# Altium PCB PCB6.pcbdoc
Units mil, origin at the board's own origin, x right, y up, seen from the top; angles counter-clockwise.
Board outline 972.44 x 1667.32 mil, 2 copper layers (Top Layer, Bottom Layer); 10 components, 7 nets, 74 pads, 24 vias.
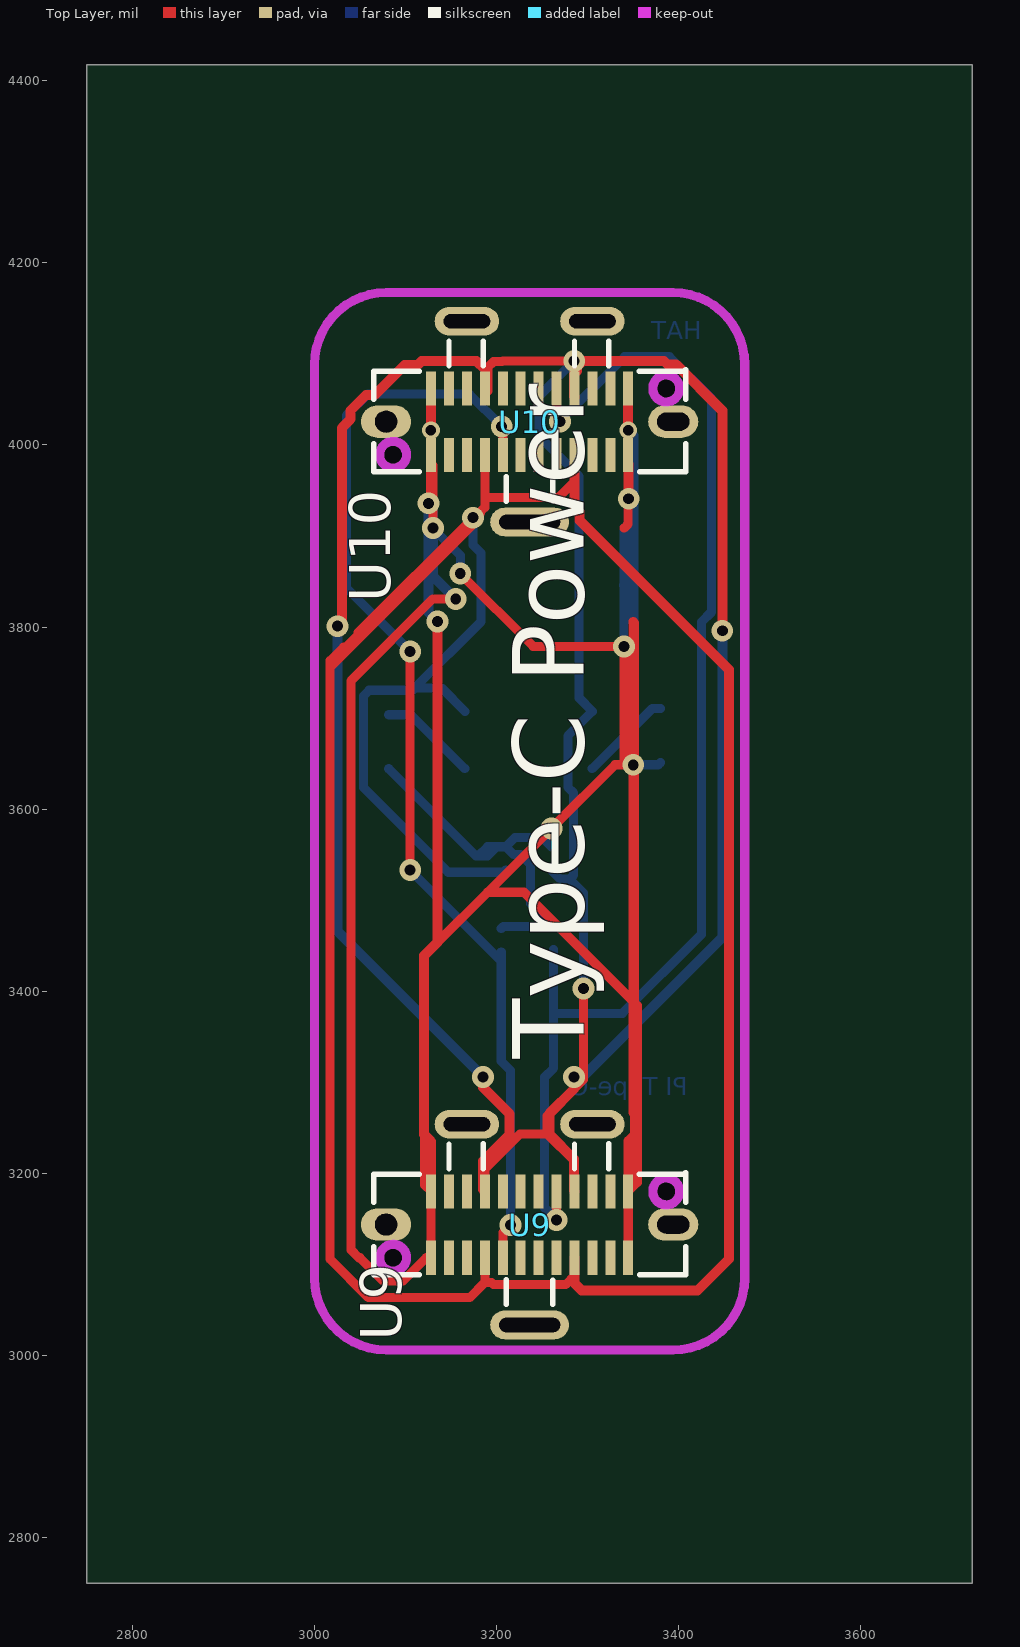
[diagram p0: Top Layer view]
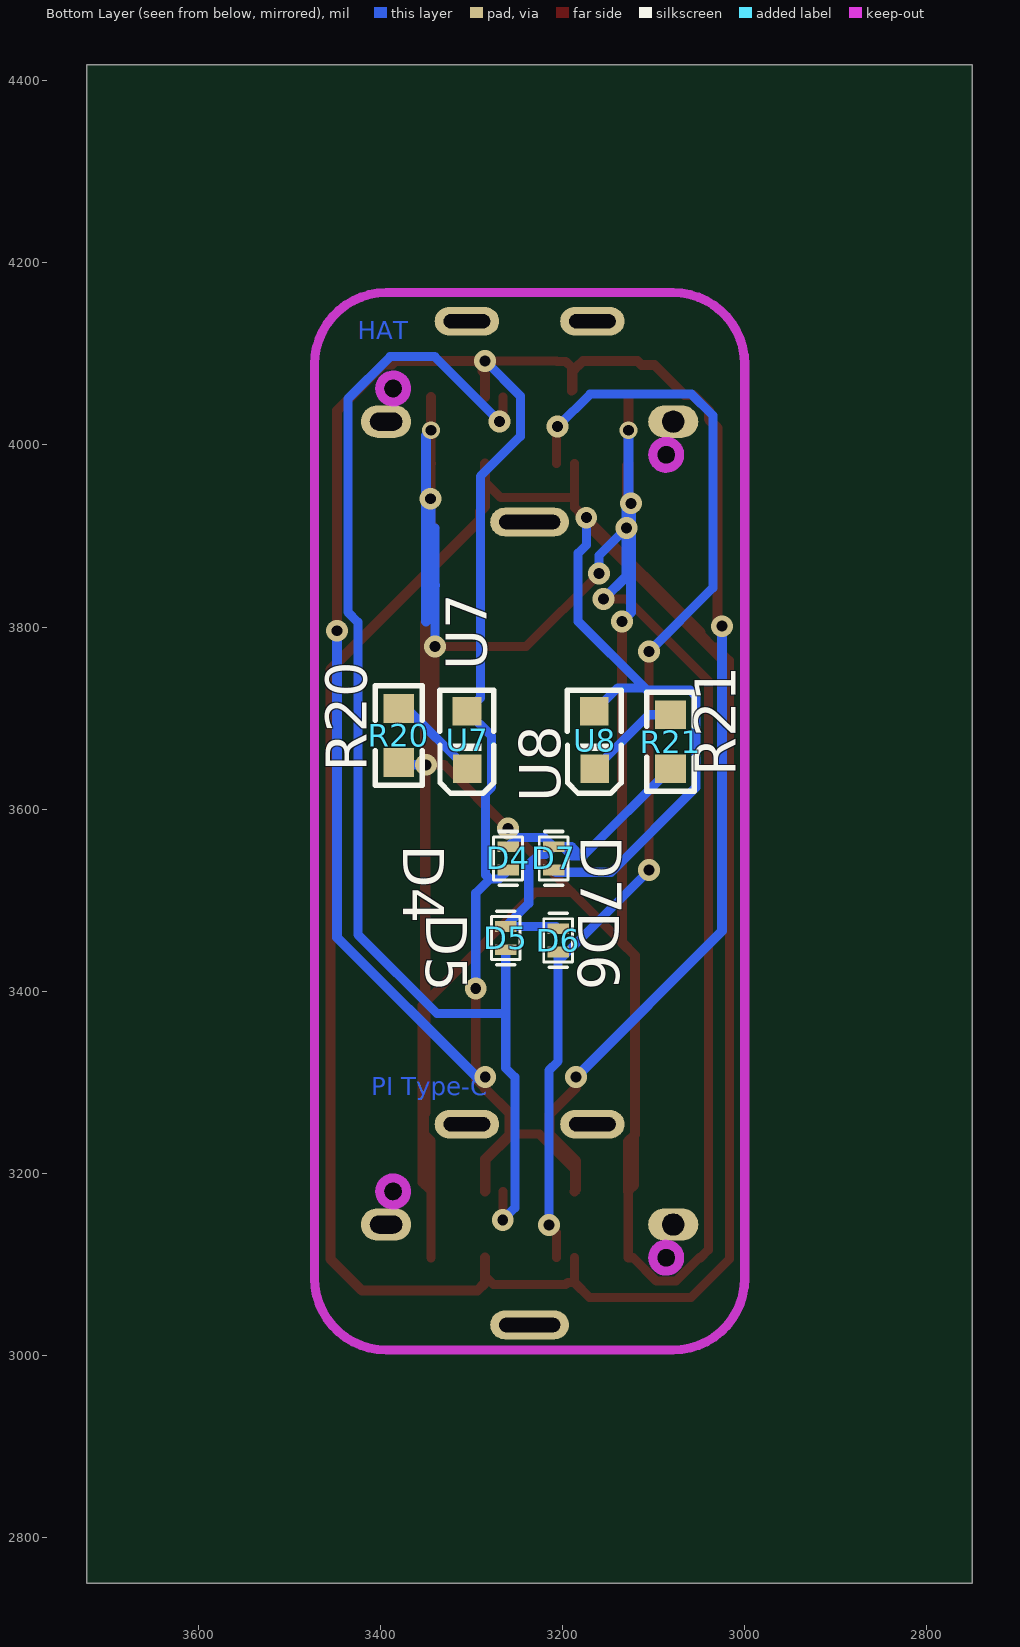
[diagram p1: Bottom Layer view, seen from below]

## Layer stack, top to bottom
Top Layer: signal copper (thickness not stored)
Dielectric: dielectric 12.6, FR-4, Dk 4.8
Bottom Layer: signal copper (thickness not stored)

## Board outline
3722.44,2750 2750,2750 2750,4417.32 3722.44,4417.32

## Design rules (kind name [scope] priority, off if disabled: settings)
BoardOutlineClearance copperThickness1oz [All] p0: genericclearance=10 ignorepadtopadclearanceinfootprint=FALSE except(0: Arc-SplitContinuation Track-SplitContinuation SMDPad-SplitContinuation THPad-SplitContinuation Via-SplitContinuation Fill-SplitContinuation Poly-SplitContinuation Region-SplitContinuation Text-SplitContinuation; 6: Track-CutoutEdge SMDPad-CutoutEdge THPad-CutoutEdge Via-CutoutEdge Region-CutoutEdge; 11.8: Track-OutlineEdge SMDPad-OutlineEdge THPad-OutlineEdge Via-OutlineEdge Fill-OutlineEdge Region-OutlineEdge Poly-OutlineEdge Text-OutlineEdge Fill-CutoutEdge)
BoardOutlineClearance copperThickness2oz [All] p0: genericclearance=10 ignorepadtopadclearanceinfootprint=FALSE except(0: Arc-SplitContinuation Track-SplitContinuation SMDPad-SplitContinuation THPad-SplitContinuation Via-SplitContinuation Fill-SplitContinuation Poly-SplitContinuation Region-SplitContinuation Text-SplitContinuation; 6: Track-CutoutEdge SMDPad-CutoutEdge THPad-CutoutEdge Via-CutoutEdge Region-CutoutEdge; 11.8: Track-OutlineEdge SMDPad-OutlineEdge THPad-OutlineEdge Via-OutlineEdge Fill-OutlineEdge Region-OutlineEdge Poly-OutlineEdge Text-OutlineEdge Fill-CutoutEdge)
Clearance copperThickness1oz [All] p1: gap=7 ignorepadtopadclearanceinfootprint=FALSE except(4: Track-Track; 6: Track-SMDPad SMDPad-SMDPad Track-THPad SMDPad-THPad THPad-THPad Track-Via SMDPad-Via THPad-Via Via-Via SMDPad-Fill THPad-Fill Via-Fill Fill-Fill Track-Region SMDPad-Region THPad-Region Via-Region Region-Region Track-Poly SMDPad-Poly THPad-Poly Via-Poly Fill-Poly Region-Poly Poly-Poly Track-Text SMDPad-Text THPad-Text Via-Text Fill-Text Region-Text Poly-Text Text-Text; 6.9: Track-Hole SMDPad-Hole THPad-Hole Via-Hole Fill-Hole Region-Hole Poly-Hole Text-Hole Sheet-Hole; 11.8: Track-Fill Fill-Region Track-Sheet SMDPad-Sheet THPad-Sheet Via-Sheet Fill-Sheet Region-Sheet Poly-Sheet Text-Sheet)
Clearance copperThickness2oz [(InNet('VBUS1') OR InNet('GND') OR InNet('CC1') OR InNet('CC2') OR InNet('VBUS2') OR InNet('$1N2887') OR InNet('$1N2974'))] p1: gap=7 ignorepadtopadclearanceinfootprint=FALSE except(6: Track-SMDPad SMDPad-SMDPad Track-THPad SMDPad-THPad THPad-THPad Track-Via SMDPad-Via THPad-Via Via-Via SMDPad-Fill THPad-Fill Via-Fill Fill-Fill Track-Region SMDPad-Region THPad-Region Via-Region Region-Region Track-Poly SMDPad-Poly THPad-Poly Via-Poly Fill-Poly Region-Poly Poly-Poly Track-Text SMDPad-Text THPad-Text Via-Text Fill-Text Region-Text Poly-Text Text-Text; 6.9: Track-Hole SMDPad-Hole THPad-Hole Via-Hole Fill-Hole Region-Hole Poly-Hole Text-Hole Sheet-Hole; 8: Track-Track; 11.8: Track-Fill Fill-Region Track-Sheet SMDPad-Sheet THPad-Sheet Via-Sheet Fill-Sheet Region-Sheet Poly-Sheet Text-Sheet)
DiffPairsRouting differentialPair [All] p1: maxuncoupledlength=10 minlimit=5.9843 maxlimit=5.9843 mostfreqgap=5.9843 toplayer_minwidth=5 toplayer_prefwidth=10 toplayer_maxwidth=100 bottomlayer_minwidth=5 bottomlayer_prefwidth=10 bottomlayer_maxwidth=100
PasteMaskExpansion pasteMaskExpansion [All] p1: expansion=0
PlaneConnect innerPlane [All] p1: planeconnectstyle=Relief reliefexpansion=20 reliefentries=4 reliefconductorwidth=10 reliefairgap=10
PolygonConnect copperRegion [All] p1: connectstyle=Relief reliefentries=4 reliefconductorwidth=10 polygonreliefangle="90 Angle" airgapwidth=10
RoutingVias viaSize [All] p1: viastyle="Through Hole" holewidth=12.0078 minholewidth=11.811 maxholewidth=248.0314 width=24.0158 minwidth=19.685 maxwidth=393.7008
SolderMaskExpansion solderMaskExpansion [All] p1: useseparateexpansions=TRUE expansion=2.0079 expansionbottom=2.0079
Width copperThickness1oz [All] p1: maxlimit=100 minlimit=5 preferedwidth=10
Width copperThickness2oz [All] p1: maxlimit=100 minlimit=8 preferedwidth=10

## Components (designator, comment, footprint, x,y, rotation, side; value= is the part's Value field where it differs from the comment)
D4 "H5VL10B" SOD-882_L1.0-W0.6-BI 3260,3545.9 r270 bottom
D5 "H5VL10B" SOD-882_L1.0-W0.6-BI 3262.5,3458.4 r270 bottom
D6 "H5VL10B" SOD-882_L1.0-W0.6-BI 3205,3455.9 r270 bottom
D7 "H5VL10B" SOD-882_L1.0-W0.6-BI 3210,3545.9 r270 bottom
R20 "RC0603FR-07470RL" R0603 3380,3680.9 r90 bottom
R21 "RC0603FR-07470RL" R0603 3081.5,3674.03 r90 bottom
U7 "PSC-1608U52GC-G4" LED0603-RD_GREEN 3305,3675.9 r90 bottom
U8 "PSC-1608U52GC-G4" LED0603-RD_GREEN 3165,3675.9 r90 bottom
U9 "MC-239" CONN-TH_MC-239 3236.22,3143.7 r90 top
U10 "MC-239" CONN-TH_MC-239 3236.22,4025.59 r90 top locked

## Footprints (in the part's own frame and the unit in brackets; to place one, negate y for a bottom-side part, rotate by r counter-clockwise, add the part's x,y. Pads: shape width x height; smd on the part's side, far side on the other; paste and mask are expansions set on the pad)
CONN-TH_MC-239 [mm]
  oval 0.9x1.4 hole 0.61 slot 0.615 at 90 deg: 0_0(0,4.005)
  oval 0.8x1.8 hole 0.4 slot 1.3 at 90 deg: 0_1(2.8,1.75) 0_2(2.8,-1.75)
  oval 0.9x1.4 hole 0.5 slot 0.9 at 90 deg: 0_3(0,-4.005)
  oval 0.8x2.2 hole 0.4 slot 1.7 at 90 deg: 0_4(-2.8,0)
  rect 0.95x0.28 smd: A1(0.925,-2.748) A2(0.925,-2.25) A3(0.925,-1.75) A4(0.925,-1.25) A5(0.925,-0.75) A6(0.925,-0.25) A7(0.925,0.25) A8(0.925,0.75) A9(0.925,1.25) A10(0.925,1.75) A11(0.925,2.25) A12(0.925,2.75) B1(-0.925,2.75) B2(-0.925,2.25) B3(-0.925,1.75) B4(-0.925,1.25) B5(-0.925,0.75) B6(-0.925,0.25) B7(-0.925,-0.25) B8(-0.925,-0.75) B9(-0.925,-1.25) B10(-0.925,-1.75) B11(-0.925,-2.25) B12(-0.925,-2.75)
  Board Outline Layer circle w0.005: c0.925,-3.81 r0.375
  Board Outline Layer circle w0.005: c-0.925,3.81 r0.375
  Board Outline Layer circle w0.254: c0.925,-3.81 r0.375
  Board Outline Layer circle w0.254: c-0.925,3.81 r0.375
  Multi-Layer board cut-out: 0.925,-4.185 1.11,-4.133 1.245,-3.996 1.294,-3.81 1.245,-3.624 1.11,-3.487 0.925,-3.435 0.925,-3.435 0.74,-3.487 0.605,-3.624 0.556,-3.81 0.605,-3.996 0.74,-4.133 0.925,-4.185
  Multi-Layer board cut-out: -0.925,3.435 -0.74,3.487 -0.605,3.624 -0.556,3.81 -0.605,3.996 -0.74,4.133 -0.925,4.185 -0.925,4.185 -1.11,4.133 -1.245,3.996 -1.294,3.81 -1.245,3.624 -1.11,3.487 -0.925,3.435
  silkscreen extent -2.22,-4.35 2.25,4.35
LED0603-RD_GREEN [mm]
  rect 0.8x0.8 smd: 1(-0.799,-0.003) 2(0.799,0.003)
  silkscreen extent -1.49,-0.75 1.39,0.76
R0603 [mil]
  rect 31.75x34.02 smd: 1(-29.66,0) 2(29.66,0)
  silkscreen extent -55,-26 55,26
SOD-882_L1.0-W0.6-BI [mm]
  rect 0.3x0.6 smd: 1(-0.325,0) 2(0.325,0)
  silkscreen extent -0.75,-0.4 0.75,0.4

## Via types
v1: diameter 24.02, hole 12.01, Top Layer to Bottom Layer, 22 vias
v2: diameter 19.68, hole 11.81, Top Layer to Bottom Layer, 2 vias

## Nets (pads, with @x,y where several pads share a name; then routed paths per layer and width w, separated by ;. In a path a pad name is that pad's centre, name@x,y a point inside that pad or via, vN(x,y) a via of type N, cw(c..) or ccw(c..) an arc to the next point about the centre after c; other vN are vias at no path point)
$1N2887: R20.2 U7.1 | length 102.5
  Bottom Layer w10: U7.1 3371,3710.56 R20.2
$1N2974: R21.2 U8.1 | length 107.9
  Bottom Layer w10: R21.2 3105.61,3703.69 U8.1
CC1: D5.2 U9.A5 U10.A5 | length 1372
  Top Layer w9.92: v1(3265.75,3148.86) U9.A5 ; U10.A5@3265.75,4052.55 3265.75,4029.56 v1(3269.45,4025.87)
  Bottom Layer w9.92: D5.2 3262.5,3375.61 ; v1(3265.75,3148.86) 3252.5,3162.11 3252.5,3305.61 3262.5,3315.61 3262.5,3375.61 ; v1(3269.45,4025.87) 3340.47,4096.89 3389.53,4096.89 3435.95,4050.47 3435.95,3816.51 3424.84,3805.41 3424.84,3462.29 3338.16,3375.61 3262.5,3375.61
CC2: D6.2 U9.B5 U10.B5 | length 1249.2
  Top Layer w9.92: v1(3105,3533.11) v1(3105,3773.11) ; v1(3205.51,4020.32) 3206.68,4019.14 U10.B5@3206.68,3979.72 ; U9.B5 3206.68,3134.79 v1(3215,3143.11)
  Bottom Layer w9.92: v1(3105,3533.11) 3205,3433.11 ; v1(3105,3773.11) 3035,3843.11 3035,4032.43 3058.47,4055.9 3169.92,4055.9 v1(3205.51,4020.32) ; D6.2 3205,3433.11 ; v1(3215,3143.11) 3215,3313.11 3205,3323.11 3205,3433.11
GND: D4.1 D5.1 D6.1 D7.1 R20.1 R21.1 U9.A1 U9.A12 U9.B1 U9.B12 U10.A1 U10.A12 U10.B1 U10.B12 | length 5782.3
  Top Layer w9.92: 3120.94,3242.1 3120.94,3187.13 U9.A12 U9.B1@3127.96,3107.3 ; U10.A12@3127.94,4052.53 3127.94,3979.72 3130,3977.67 v1(3130,3908.7) ; 3135,3453.7 3190,3508.7 ; v1(3160,3858.7) 3240,3778.7 v1(3340,3778.7) v1@3340,3648.7 ; v1(3260,3578.7) 3190,3508.7 ; 3340,3908.7 3344.47,3913.17 v1@3344.47,3949.8 ; U9.B12@3344.41,3107.34 U9.A1 ; U10.B12@3344.47,3979.72 v2(3344.46,4016.14) ; 3351.54,3187.24 3354.41,3190.11 3354.41,3384.29 3351.54,3387.16 3350,3388.7 3230,3508.7 3190,3508.7
  Top Layer w10: U9.B1 3122.63,3107.28 3096.89,3081.54 3075.56,3081.54 3049.81,3107.28 3048.62,3107.28 3040,3115.9 3040,3740.9 3130,3830.9 v1(3155,3830.9) ; v1(3260,3578.7) 3330,3648.7 3340,3648.7 v1(3350,3648.7) ; U9.B12 U9.A1@3344.47,3180.11 ; v1(3350,3648.7) 3350,3388.7 3350,3266.54 3351.54,3265.01 ; v1(3350,3648.7) 3350,3805.9 3351.54,3804.37 3351.54,3387.16 3351.54,3265.01 ; 3351.54,3242.86 3344.47,3235.79 3344.47,3180.17 3351.54,3187.24 3351.54,3242.86 ; 3351.54,3242.86 3351.54,3265.01
  Top Layer w11.02: v1(3125,3935.9) 3127.94,3938.84 U10.B1@3127.94,3979.72 ; v2(3127.64,4016.14) 3127.64,4052.24 U10.A12@3127.94,4052.53 ; U9.A12 3127.96,3235.08 3120.94,3242.1 3120.39,3242.65 3120.39,3439.09 3135,3453.7 v1(3135,3805.9) ; U10.B12@3344.47,3979.72 3345,3979.2 v1(3345,3940.9) ; v2(3344.46,4016.14) U10.A1@3344.46,4052.5
  Bottom Layer w9.92: v1(3130,3908.7) 3160,3878.7 v1(3160,3858.7) ; v1(3340,3778.7) 3340,3845.9 3340,3908.7
  Bottom Layer w10: R21.1 3177.17,3548.7 3180,3548.7 ; D6.1 3207.5,3471.2 D5.1 3237.2,3496.49 3237.2,3539.15 3226.36,3550 3218.7,3550 D7.1 ; D4.1 3250,3568.7 ; v1(3260,3578.7) 3250,3568.7 ; v1(3350,3648.7) 3377.45,3648.7 R20.1 ; 3180,3548.7 3190,3548.7 D7.1@3200,3558.7 ; 3180,3548.7 3190,3558.7 D7.1@3200,3558.7 ; D7.1@3200,3558.7 D7.1 ; D7.1 3220,3568.7 3250,3568.7
  Bottom Layer w11.02: v2(3127.64,4016.14) v1@3127.64,3933.26 ; v1(3135,3805.9) 3125,3815.9 3125,3930.62 v1@3127.64,3933.26 ; v1(3155,3830.9) 3130,3855.9 v1(3130,3908.7) 3130,3930.9 v1@3127.64,3933.26 ; 3340,3845.9 3345,3850.9 v1(3345,3940.9) ; v2(3344.46,4016.14) 3350,4010.6 3350,3805.9
VBUS1: D4.2 U7.2 U9.A4 U9.A9 U10.A4 U10.A9 | length 3521.8
  Top Layer w9.92: U9.A9 3187.01,3204.68 3225.44,3243.11 3255.44,3243.11 ; U10.A9@3190.24,4059.32 3190.24,4085.24 3196.65,4091.65 3206.1,4091.65 3206.83,4092.38 v1(3285.14,4092.38) U10.A4@3285.14,4078.04 ; 3258.19,3265.86 3255.44,3263.11 3255.44,3243.11 ; 3285,3292.67 3295.44,3303.11 v1(3295.44,3403.11) ; 3285.44,3213.11 3285,3213.55 3255.44,3243.11
  Top Layer w11.02: v1(3025,3800.9) 3030,3805.9 3030,4018.76 3039.49,4028.25 3039.49,4037.69 3056.6,4054.81 3066.05,4054.81 3098.99,4087.75 3113.24,4087.75 3117.69,4092.2 3177.6,4092.2 3182.05,4087.75 3182.6,4087.75 3189.34,4081.02 U10.A9@3189.34,4060.23 ; v1(3185.16,3305.9) 3185.16,3294.31 3214.25,3265.22 3214.25,3242.65 3185.16,3213.56 3185.16,3181.97 U9.A9 ; v1(3285,3305.9) 3285,3292.67 3258.19,3265.86 3258.19,3242.65 3285,3215.84 3285,3213.55 3285,3180.55 U9.A4 ; U10.A4@3285.44,4052.55 3285.14,4052.86 3285.14,4078.04 3288.11,4081.02 3288.11,4085.47 3294.85,4092.2 3383.71,4092.2 3387.65,4088.26 3397.1,4088.26 3447.79,4037.57 v1(3447.79,3795.9)
  Bottom Layer w9.92: 3280,3523.11 3295.44,3507.67 v1(3295.44,3403.11) ; v1(3285.14,4092.38) 3246.49,4053.73 3246.49,4009.35 3290.47,3965.37 3290.47,3722.04 U7.2
  Bottom Layer w10: D4.2 3270,3523.11 3280,3523.11 3284.57,3527.68 3284.57,3617.7 3278.13,3624.13 3278.13,3680.38 U7.2
  Bottom Layer w11.02: v1(3025,3800.9) 3025,3466.06 v1(3185.16,3305.9) ; v1@3292.79,3304.13 3447.79,3459.13 v1(3447.79,3795.9)
VBUS2: D7.2 U8.2 U9.B4 U9.B9 U10.B4 U10.B9 | length 4071
  Top Layer w9.92: 3016.99,3105.72 3016.99,3755.9 3016.99,3763.07 3031.87,3777.95 3034.51,3777.95 3047.95,3791.4 3047.95,3794.04 v1(3174.02,3920.1) 3177.03,3923.11 v1@3180,3923.11 ; 3186.99,3080.1 3194.17,3080.1 3196.63,3077.64 3275.78,3077.64 3285.43,3087.28 ; 3186.99,3940.1 3188.94,3942.05 3267.75,3942.05 3285.43,3959.72
  Top Layer w10: U9.B4 3186.99,3080.1 3170.43,3063.54 3059.17,3063.54 3016.99,3105.72 3016.81,3105.9 3016.81,3755.72 3016.99,3755.9 3180,3918.91 v1@3180,3923.11 ; U10.B4@3186.99,3979.72 3186.99,3940.1 3186.99,3931.49 v1@3181.93,3926.43 ; v1@3180,3923.11 3180,3924.5 v1@3181.93,3926.43 ; v1@3180,3923.11 3181.93,3925.04 v1@3181.93,3926.43
  Top Layer w11.02: U9.B9 3285.43,3087.28 3285.43,3079.33 3293.38,3071.38 3420.59,3071.38 3455.12,3105.9 3455.12,3753.1 3291.02,3917.19 3291.02,3926.64 3285.43,3932.23 3285.43,3959.72 U10.B9@3285.43,3979.72
  Bottom Layer w9.92: 3110,3733.11 3182.95,3806.06 3182.95,3881.08 3174.02,3890.02 v1(3174.02,3920.1)
  Bottom Layer w10: U8.2 3139.41,3733.11 3110,3733.11 3107.44,3730.55 3059.94,3730.55 3053.51,3724.11 3053.51,3623.94 3146.74,3530.71 3207.6,3530.71 D7.2
pads on no net: U9.0_0 U9.0_1 U9.0_2 U9.0_3 U9.0_4 U9.A2 U9.A3 U9.A6 U9.A7 U9.A8 U9.A10 U9.A11 U9.B2 U9.B3 U9.B6 U9.B7 U9.B8 U9.B10 U9.B11 U10.0_0 U10.0_1 U10.0_2 U10.0_3 U10.0_4 U10.A2 U10.A3 U10.A6 U10.A7 U10.A8 U10.A10 U10.A11 U10.B2 U10.B3 U10.B6 U10.B7 U10.B8 U10.B10 U10.B11

## Keep-outs
Board Outline Layer:
  lines w10: 3000,3084.64 ccw(c3078.74,3084.64) 3078.74,3005.9 3393.7,3005.9 ccw(c3393.7,3084.64) 3472.44,3084.64 3472.44,4088.58 ccw(c3393.7,4088.58) 3393.7,4167.32 3078.74,4167.32 ccw(c3078.74,4088.58) 3000,4088.58 3000,3084.64

## Other copper
Bottom Layer:
  text "HAT" at 3425,4115.9 h19.68
  text "PI Type-C" at 3410,3285.9 h19.68

## Silkscreen, mask and mechanical layers (free items; w line width, h text height)
Top Silkscreen Layer:
  text "Type-C Power" at 3295.44,3325.86 h78.74 r90